# Altium PCB MiniRobot.PcbDoc
Units mm, origin at the board's own origin, x right, y up, seen from the top; angles counter-clockwise.
Board outline 90 x 85 mm, 2 copper layers (Top Layer, Bottom Layer); 52 components, 46 nets, 193 pads, 24 vias.
Unrouted connection lines stored in the file: 31.
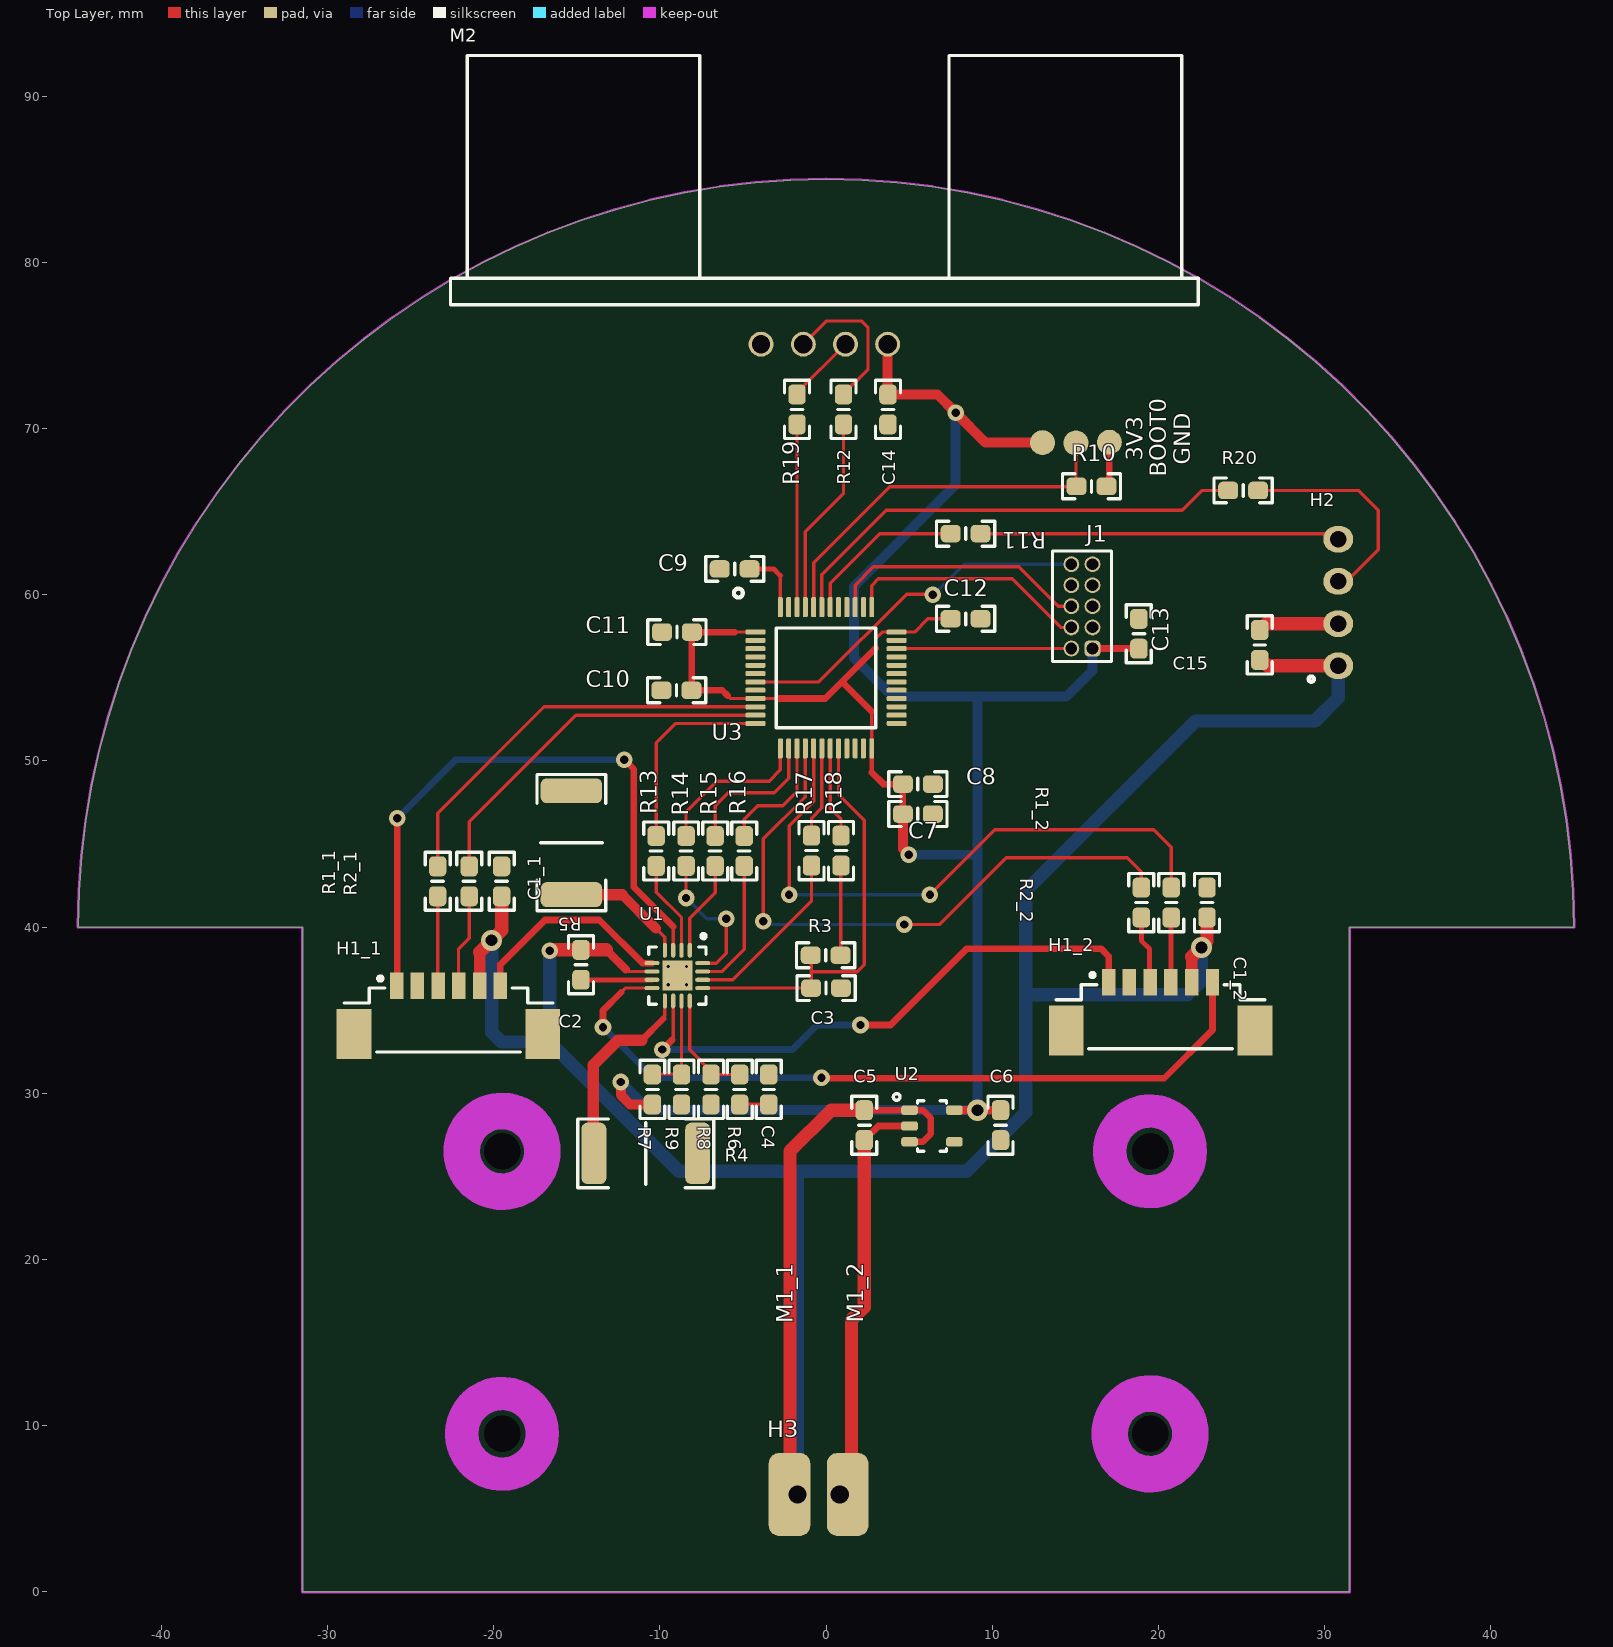
[diagram p0: Top Layer view]
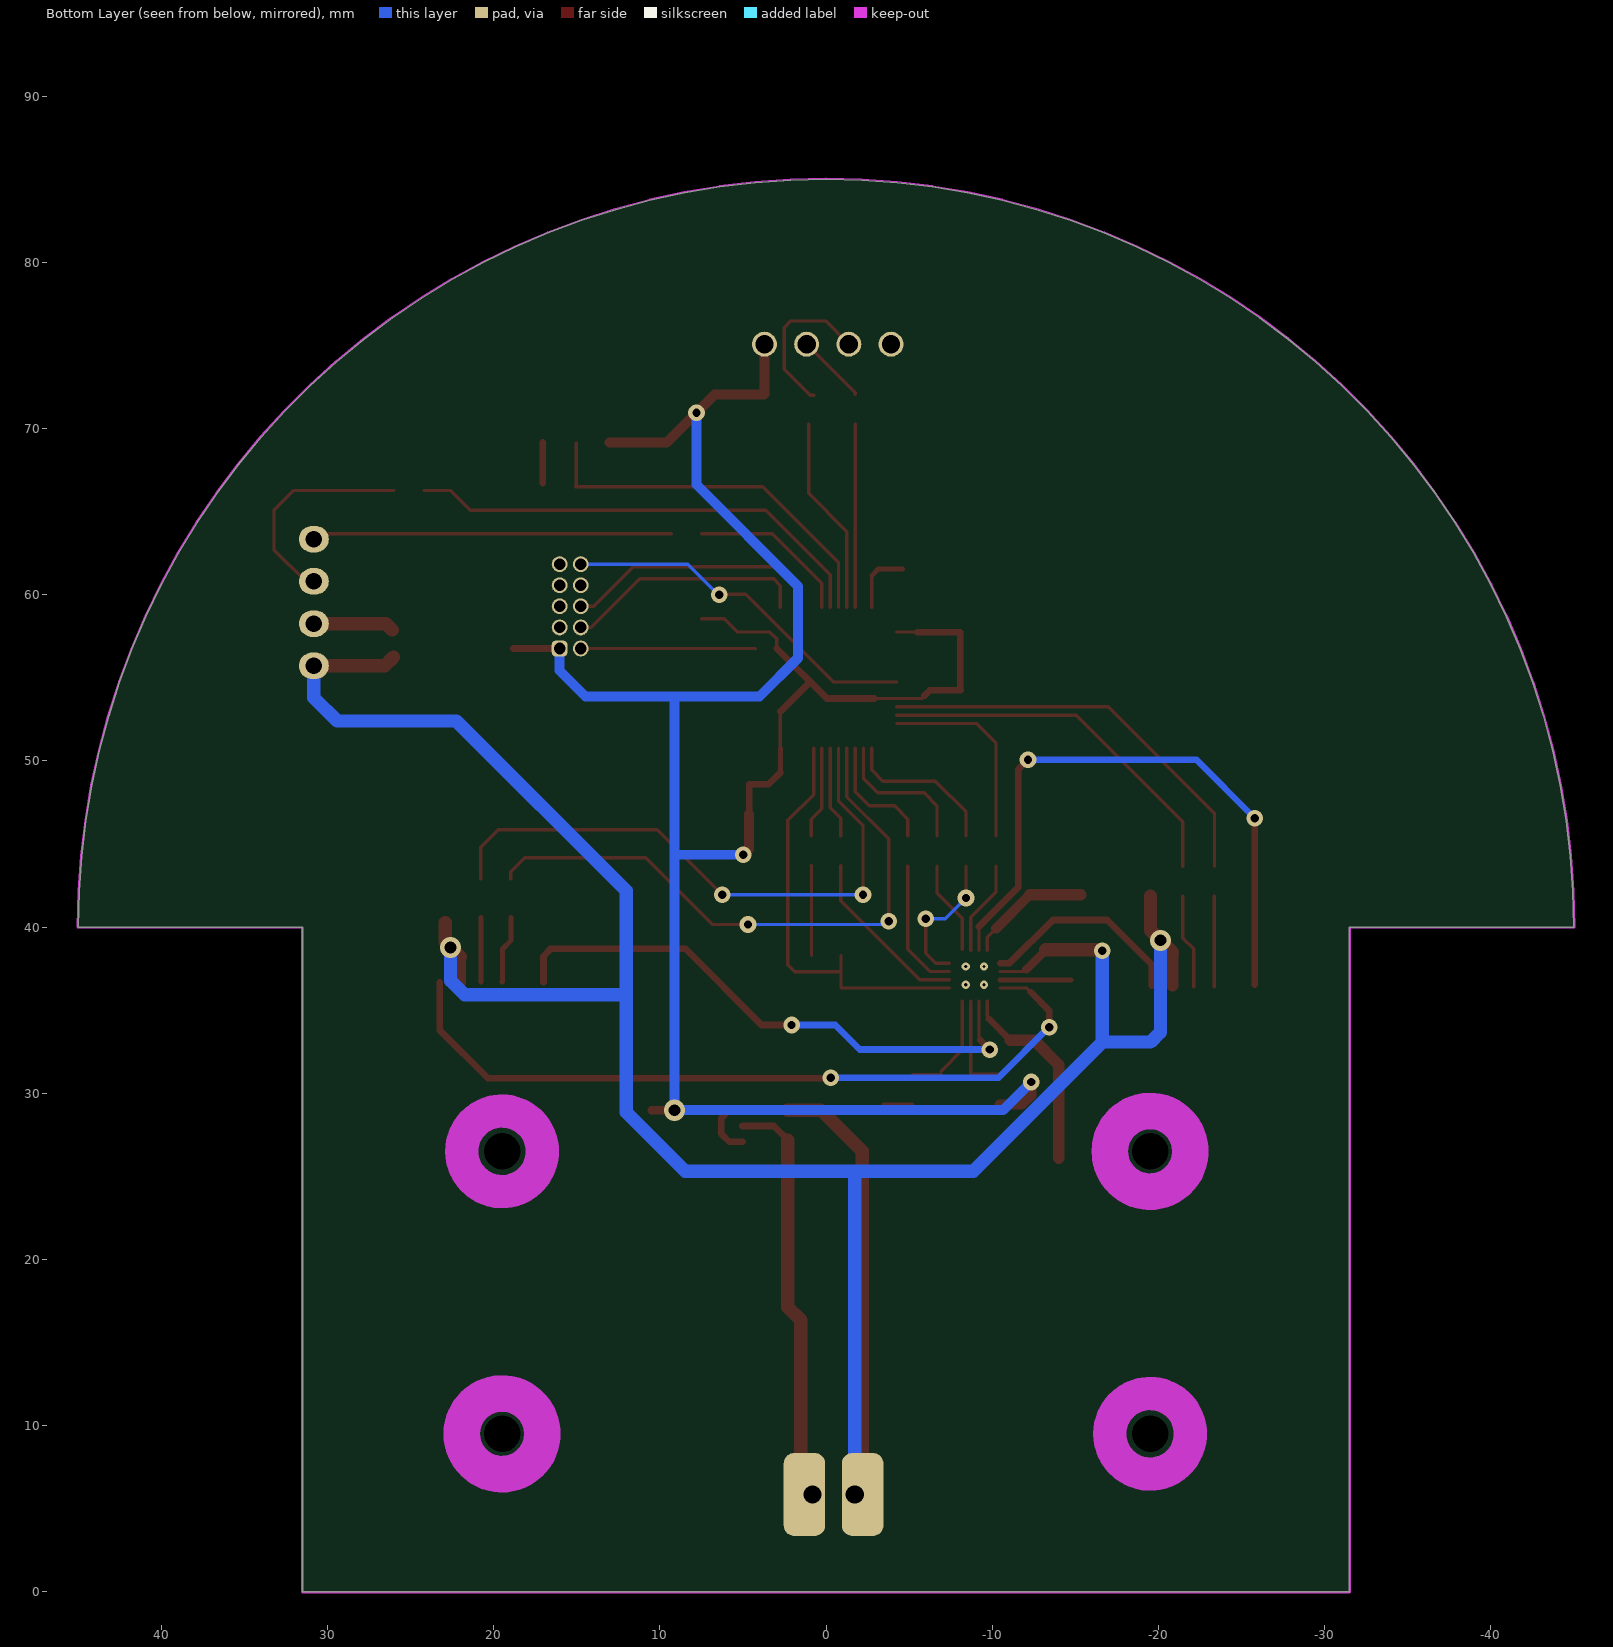
[diagram p1: Bottom Layer view, seen from below]

## Layer stack, top to bottom
Top Solder: solder mask 0.0102, Solder Resist, Dk 3.5
Top Layer: signal copper 0.0356
Dielectric 1: dielectric 0.32, FR-4, Dk 4.8
Bottom Layer: signal copper 0.0356
Bottom Solder: solder mask 0.0102, Solder Resist, Dk 3.5

## Board outline
45,40 44.949,42.141 44.796,44.278 44.542,46.404 44.187,48.516 43.732,50.609 43.177,52.678 42.525,54.718 41.777,56.725 40.933,58.694 39.998,60.62 38.971,62.5 37.856,64.329 36.656,66.103 35.372,67.817 34.009,69.469 32.568,71.054 31.054,72.568 29.469,74.009 27.817,75.372 26.103,76.656 24.329,77.856 22.5,78.971 20.62,79.998 18.694,80.933 16.725,81.777 14.718,82.525 12.678,83.177 10.609,83.732 8.516,84.187 6.404,84.542 4.278,84.796 2.141,84.949 0,85 -2.141,84.949 -4.278,84.796 -6.404,84.542 -8.516,84.187 -10.609,83.732 -12.678,83.177 -14.718,82.525 -16.725,81.777 -18.694,80.933 -20.62,79.998 -22.5,78.971 -24.329,77.856 -26.103,76.656 -27.817,75.372 -29.469,74.009 -31.054,72.568 -32.568,71.054 -34.009,69.469 -35.372,67.817 -36.656,66.103 -37.856,64.329 -38.971,62.5 -39.998,60.62 -40.933,58.694 -41.777,56.725 -42.525,54.718 -43.177,52.678 -43.732,50.609 -44.187,48.516 -44.542,46.404 -44.796,44.278 -44.949,42.141 -45,40 -31.5,40 -31.5,0 31.5,0 31.5,40

## Design rules (kind name [scope] priority, off if disabled: settings)
Clearance [All] p1 off: gap=0.25
ComponentClearance ComponentClearance_1 [All] p1 off: gap=0.001 collisioncheckmode=3 verticalgap=0.254 showdistances=FALSE
HoleSize [All] p1: absolutevalues=TRUE maxlimit=10 minlimit=0.19 maxpercent=80.000 minpercent=20.000
MinimumAnnularRing [All] p1: minimumring=0.076
MinimumSolderMaskSliver [All] p1: minsoldermaskwidth=0.154
PolygonConnect [All] p1: connectstyle=Relief reliefconductorwidth=0.254 reliefentries=4 polygonreliefangle="45 Angle" airgapwidth=0.254
RoutingVias [All] p1: holewidth=0.25 width=0.6 viastyle="Through Hole" minholewidth=0.2 minwidth=0.45 maxholewidth=1 maxwidth=2
SilkToSilkClearance [All] p1: silktosilkclearance=0.001
SilkToSolderMaskClearance [IsPad] p1: minsilkscreentomaskgap=0 clearancetoexposedcopper=TRUE
SolderMaskExpansion SolderMask_Via [IsVia] p1: expansion=-100
SolderMaskExpansion [All] p2: expansion=0.102
Width [All] p1: maxlimit=10 minlimit=0.075 preferedwidth=0.2 minimp=50.000000 maximp=50.000000 favimp=50.000000
24 further rules are at their usual default settings.

## Classes and differential pairs
component class U_MR_UartConnector: C15 H2 R20
component class U_MR_RangeSensor: C14 M2 R12
component class U_MR_Motor_Control: C2 C3 C4 R3 R4 R5 R6 R7 R8 R9 U1
channel class MR_Motor: LeftMotor RightMotor
component class U_MR_Power: C5 C6 H3 U2
component class RightMotor: C1_2 H1_2 M1_2 R1_2 R2_2
component class LeftMotor: C1_1 H1_1 M1_1 R1_1 R2_1
component class U_MR_Mcu: 3V3 BOOT0 C7 C8 C9 C10 C11 C12 C13 GND J1 R10 R11 R13 R14 R15 R16 R17 R18 R19 U3

## Components (designator, comment, footprint, x,y, rotation, side; value= is the part's Value field where it differs from the comment)
3V3 "TestPoint" ROUND_TEST_POINT 13.025,69.15 r180 top
BOOT0 "TestPoint" ROUND_TEST_POINT 15.037,69.125 r270 top
C1_1 "CerCap" 0603_CAP_LD -19.525,42.75 r270 top (schematic designator C1)
C1_2 "CerCap" 0603_CAP_LD 22.925,41.475 r270 top (schematic designator C1)
C2 "CerCap" 0603_CAP_LD -14.75,37.725 r90 top
C3 "CerCap" 0603_CAP_LD 0,36.325 r180 top
C4 "CerCap" 0603_CAP_LD -3.45,30.225 r270 top
C5 "CerCap" 0603_CAP_LD 2.3,28.075 r90 top
C6 "CerCap" 0603_CAP_LD 10.5,28.075 r90 top
C7 "CerCap" 0603_CAP_LD 5.525,46.8 r180 top
C8 "CerCap" 0603_CAP_LD 5.525,48.6 r180 top
C9 "CerCap" 0603_CAP_LD -5.5,61.55 r0 top
C10 "CerCap" 0603_CAP_LD -9,54.25 r0 top
C11 "CerCap" 0603_CAP_LD -8.975,57.75 r0 top
C12 "CerCap" 0603_CAP_LD 8.4,58.55 r180 top
C13 "CerCap" 0603_CAP_LD 18.825,57.65 r270 top
C14 "CerCap" 0603_CAP_LD 3.725,71.15 r90 top
C15 "CerCap" 0603_CAP_LD 26.1,56.975 r270 top
GND "TestPoint" ROUND_TEST_POINT 17.05,69.175 r90 top
H1_1 "Header" HEADER_1X6_PICOBLADE_653106124022 -22.725,34.4 r0 top (schematic designator H1)
H1_2 "Header" HEADER_1X6_PICOBLADE_653106124022 20.131,34.607 r0 top (schematic designator H1)
H2 "Header" "HE14 1x4 Straight" 30.825,59.53 r90 top
H3 "CustomBatteryConnector" CUSTOMBATTERYCONNECTOR -0.45,5.85 r0 top
J1 "Debug" 62201021121 15.4,59.3 r90 top
M1_1 "MotorGroup" MOTORGROUP -1,18 r0 top locked (schematic designator M1)
M1_2 "MotorGroup" MOTORGROUP 1,18 r180 top locked (schematic designator M1)
M2 "Ultrasonic Range Sensor" HC-SR04 -0.1,75.075 r0 top
R1_1 "Resistor" 0603_RES_LD -23.375,42.75 r270 top (schematic designator R1)
R1_2 "Resistor" 0603_RES_LD 18.975,41.475 r270 top (schematic designator R1)
R2_1 "Resistor" 0603_RES_LD -21.475,42.75 r270 top (schematic designator R2)
R2_2 "Resistor" 0603_RES_LD 20.775,41.475 r270 top (schematic designator R2)
R3 "Resistor" 0603_RES_LD -0.025,38.3 r0 top
R4 "Resistor" 2512_RES_LD -10.85,26.375 r180 top
R5 "Resistor" 2512_RES_LD -15.325,45.075 r270 top
R6 "Resistor" 0603_RES_LD -5.2,30.225 r90 top
R7 "Resistor" 0603_RES_LD -10.45,30.225 r270 top
R8 "Resistor" 0603_RES_LD -6.925,30.225 r90 top
R9 "Resistor" 0603_RES_LD -8.7,30.225 r90 top
R10 "Resistor" 0603_RES_LD 15.975,66.525 r180 top
R11 "Resistor" 0603_RES_LD 8.4,63.675 r180 top
R12 "Resistor" 0603_RES_LD 1.05,71.15 r90 top
R13 "Resistor" 0603_RES_LD -10.225,44.575 r90 top
R14 "Resistor" 0603_RES_LD -8.425,44.575 r90 top
R15 "Resistor" 0603_RES_LD -6.675,44.575 r90 top
R16 "Resistor" 0603_RES_LD -4.925,44.575 r90 top
R17 "Resistor" 0603_RES_LD -0.875,44.6 r90 top
R18 "Resistor" 0603_RES_LD 0.9,44.6 r90 top
R19 "Resistor" 0603_RES_LD -1.75,71.15 r270 top
R20 "Resistor" 0603_RES_LD 25.1,66.275 r0 top
U1 "Dual Brush Motor Driver" QFN-STSPIN240 -8.95,37.075 r270 top
U2 "Low noise, Low Iq LDO" LP5907 6.375,28.025 r0 top
U3 "Microcontroller" STM32_LQFP48 0,55 r0 top

## Footprints (in the part's own frame and the unit in brackets; to place one, negate y for a bottom-side part, rotate by r counter-clockwise, add the part's x,y. Pads: shape width x height; smd on the part's side, far side on the other; paste and mask are expansions set on the pad)
0603_CAP_LD [mm] "0603 Capacitor Low Density"
  rrect50% 1.2x1.05 smd: 1(-0.9,0) 2(0.9,0)
  silkscreen extent -1.75,-0.75 1.75,0.75
0603_RES_LD [mm] "0603 Resistor Low Density"
  rrect50% 1.2x1.05 smd: 1(-0.9,0) 2(0.9,0)
  silkscreen extent -1.75,-0.75 1.75,0.75
2512_RES_LD [mm] "2512 Low Density Resistor"
  rrect50% 1.5x3.7 smd: 1(-3.125,0) 2(3.125,0)
  silkscreen extent -4.1,-2.08 4.1,2.07
62201021121 [mm] "Pin Header, pitch 1.27 mm, THT, Vertical, dual row, 10p"
  rrect50% 0.95x0.95 hole 0.7: 1(-2.54,-0.635)
  round 0.95 hole 0.7: 2(-2.54,0.635) 3(-1.27,-0.635) 4(-1.27,0.635) 5(0,-0.635) 6(0,0.635) 7(1.27,-0.635) 8(1.27,0.635) 9(2.54,-0.635) 10(2.54,0.635)
  silkscreen extent -3.32,-1.78 3.33,1.78, body extent -3.17,-1.7 3.18,1.7, height 5.33
CUSTOMBATTERYCONNECTOR [mm] "CustomBatteryConnector"
  rrect50% 2.5x5 smd paste-100: +(-1.75,0) -(1.75,0)
  rrect50% 2.5x5 smd far side paste-100: +(-1.75,0) -(1.75,0)
  round 1.5 hole 1.1 unplated paste-100: +(-1.27,0) -(1.27,0)
HC-SR04 [mm] "HC-SR04"
  round 1.5 hole 1.1 unplated: 1(-3.81,0) 2(-1.27,0) 3(1.27,0) 4(3.81,0)
  silkscreen extent -22.5,2.37 22.5,17.38, body extent -22.72,-0.3 22.72,17.49, height 20
"HE14 1x4 Straight" [mm] "Connector HE14 Straight 1x4"
  oval 1.6x1.8 hole 1 mask+0.102: 1(-3.81,0) 2(-1.27,0) 3(1.27,0) 4(3.81,0)
  silkscreen extent -4.77,1.47 -4.45,1.78, body extent -5.08,-1.27 5.08,1.27, height 9.5
HEADER_1X6_PICOBLADE_653106124022 [mm] "1.25mm SMT Male Vertical Shrouded Header, 6p"
  rect 0.81x1.6 smd: 1(-3.125,2.07) 2(-1.875,2.07) 3(-0.625,2.07) 4(0.625,2.07) 5(1.875,2.07) 6(3.125,2.07)
  rect 2.1x3 smd: ""(-5.675,-0.83) ""(5.675,-0.83)
  silkscreen extent -6.27,-1.93 6.28,2.62
LP5907 [mm] "LP5907 SOT23"
  rrect50% 1x0.55 smd mask+0.102: 1(-1.35,0.95) 2(-1.35,0) 3(-1.35,-0.95) 4(1.35,-0.95) 5(1.35,0.95)
  silkscreen extent -2.33,-1.53 0.87,1.95
MOTORGROUP [mm]
  round 0 hole 2.2 unplated paste+0 mask+0: 21(-18.5,8.5) 22(-18.5,-8.5)
  Keep-Out Layer circle w2.2: c-18.5,8.5 r2.425
  Keep-Out Layer circle w2: c-18.5,-8.5 r2.425
QFN-STSPIN240 [mm] "QFN, 16-Leads, Body 3,00x3,00mm, Pitch 0,50mm, Thermal Pad 1,80x1,80mm, IPC Low Density"
  oval 0.9x0.25 smd: 1(-1.525,0.75) 2(-1.525,0.25) 3(-1.525,-0.25) 4(-1.525,-0.75) 9(1.525,-0.75) 10(1.525,-0.25) 11(1.525,0.25) 12(1.525,0.75)
  oval 0.25x0.9 smd: 5(-0.75,-1.525) 6(-0.25,-1.525) 7(0.25,-1.525) 8(0.75,-1.525) 13(0.75,1.525) 14(0.25,1.525) 15(-0.25,1.525) 16(-0.75,1.525)
  rect 1.8x1.8 smd: 17(0,0)
  silkscreen extent -2.5,-1.72 1.72,1.72
ROUND_TEST_POINT [mm] "Small round test point"
  round 1.5 smd paste-100: 1(0,0)
STM32_LQFP48 [mm]
  rrect50% 1.2x0.3 smd: 1(-4.25,2.75) 2(-4.25,2.25) 3(-4.25,1.75) 4(-4.25,1.25) 5(-4.25,0.75) 6(-4.25,0.25) 7(-4.25,-0.25) 8(-4.25,-0.75) 9(-4.25,-1.25) 10(-4.25,-1.75) 11(-4.25,-2.25) 12(-4.25,-2.75) 25(4.25,-2.75) 26(4.25,-2.25) 27(4.25,-1.75) 28(4.25,-1.25) 29(4.25,-0.75) 30(4.25,-0.25) 31(4.25,0.25) 32(4.25,0.75) 33(4.25,1.25) 34(4.25,1.75) 35(4.25,2.25) 36(4.25,2.75)
  rrect50% 0.3x1.2 smd: 13(-2.75,-4.25) 14(-2.25,-4.25) 15(-1.75,-4.25) 16(-1.25,-4.25) 17(-0.75,-4.25) 18(-0.25,-4.25) 19(0.25,-4.25) 20(0.75,-4.25) 21(1.25,-4.25) 22(1.75,-4.25) 23(2.25,-4.25) 24(2.75,-4.25) 37(2.75,4.25) 38(2.25,4.25) 39(1.75,4.25) 40(1.25,4.25) 41(0.75,4.25) 42(0.25,4.25) 43(-0.25,4.25) 44(-0.75,4.25) 45(-1.25,4.25) 46(-1.75,4.25) 47(-2.25,4.25) 48(-2.75,4.25)
  silkscreen extent -5.54,-3 3,5.37

## Part data
C1_1 C1_2 C2 C3 C4 C5 C6 C7 C8 C9 C10 C11 C12 C13 C14 C15: "Ceramic Capacitor"
H1_1 H1_2: library part Header_6x1, "Header 6x1 Pins"
H2: library part Header_4x1, "Header 4x1 PIns"
H3: library part BatteryConnector, "Custom Battery Connector"
J1: library part Cortex_10x2, "Cortex 10 pins Debug Connector"
M1_1 M1_2: library part Motor, "N20 Motor Group"
M2: library part HC-SR04
U1: library part STSPIN240, "ST Dual Motor Driver"
U2: library part LP5907, "LP5907 Low Noise Low Iq LDO"
U3: library part STM32F303CBT6, "STM32F303 Microcontroller"

## Via types
v1: diameter 1, hole 0.5, Top Layer to Bottom Layer, 17 vias
v2: diameter 0.5, hole 0.2, Top Layer to Bottom Layer, 4 vias
v3: diameter 1.27, hole 0.711, Top Layer to Bottom Layer, 3 vias

## Nets (pads, with @x,y where several pads share a name; then routed paths per layer and width w, separated by ;. In a path a pad name is that pad's centre, name@x,y a point inside that pad or via, vN(x,y) a via of type N, cw(c..) or ccw(c..) an arc to the next point about the centre after c; other vN are vias at no path point)
3V3: 3V3.1 C6.2 C7.2 C8.2 C9.2 C10.2 C11.2 C12.2 C13.2 C14.2 J1.1 M2.4 R7.2 U2.5 U3.1 U3.9 U3.24 U3.36 U3.48 | length 149.9
  Top Layer w0.2: -5.925,53.925 -5.75,53.75 U3.9 -2.9,53.75 ; -5.5,57.75 U3.1 ; U3.48 -2.75,61.15 ; U3.24 2.75,52.975 ; 2.975,56.775 2.975,57.35 3.375,57.75 U3.36 5.325,57.75 6.125,58.55 C12.2
  Top Layer w0.3: C9.2 -3.15,61.55 -2.75,61.15 ; 2.75,49.3 U3.24
  Top Layer w0.4: C10.2 -6.25,54.25 -5.925,53.925 ; C10.2@-8.075,54.275 C11.2 -5.5,57.75 ; -2.9,53.75 -0.05,53.75 2.975,56.775 ; 0.975,54.75 2.75,52.975 ; 2.75,49.3 3.45,48.6 C8.2 C7.2 ; J1.1 18.815,56.76 C13.2
  Top Layer w0.5: U2.5 v3(9.113,28.975) C6.2
  Top Layer w0.6: v1(-12.35,30.675) -12.35,29.875 -11.8,29.325 R7.2 ; C14.2@3.71,72.09 M2.4 ; C14.2 6.7,72.05 v1(7.8,70.95) 9.6,69.15 3V3.1 ; C7.2 4.625,44.7 v1(4.975,44.35)
  Bottom Layer w0.6: v1(-12.35,30.675) -10.65,28.975 v3(9.113,28.975) 9.113,44.35 ; v1(4.975,44.35) 9.113,44.35 ; v1(7.8,70.95) 7.8,66.625 1.675,60.5 1.675,56.2 4,53.875 14.475,53.875 16.035,55.435 J1.1 ; 9.113,53.875 9.113,44.35
BOOT0: BOOT0.1 R10.2 U3.44 | length 22.9
  Top Layer w0.2: U3.44 -0.75,61.925 3.825,66.5 R10.2@15.062,66.5 ; R10.2@15.037,66.563 BOOT0.1
GND: C1_1.1 C1_2.1 C2.1 C3.1 C4.1 C5.1 C6.1 C7.1 C8.1 C9.1 C10.1 C11.1 C12.1 C13.1 C14.1 C15.1 GND.1 H1_1.2 H1_2.2 H2.2 H3.- J1.3 J1.5 J1.9 M2.1 R4.1 R5.1 R8.1 R9.1 R10.1 U1.7 U2.2 U3.8 U3.23 U3.35 U3.47 | length 36.9
  Top Layer w0.2: H2.2@30.615,58.05 H2.2
  Top Layer w0.3: C2.1 U1.7
  Top Layer w0.4: C5.1 3.15,28.025 U2.2 ; R10.1@17.05,66.7 GND.1
  Top Layer w0.8: H3.-@0.82,5.85 1.525,6.555 1.525,16.35 2.3,17.125 C5.1 ; C15.1 26.485,58.26 H2.2
NetC3_2: C3.2 R3.1 U1.13 U3.20 | length 25.5
  Top Layer w0.2: U1.13 C3.2 -0.9,37.3 ; R3.1@-0.9,38.275 -0.9,37.3 ; U3.20 0.75,47.975 2.3,46.425 2.3,37.725 1.875,37.3 -0.9,37.3
NetC4_2: C4.2 R6.1 | length 1.8
  Top Layer w0.2: R6.1 C4.2
NetH1_1_1: H1_1.1 U1.3 | length 37.9
  Top Layer w0.2: H1_1.1 H1_1.1@-25.8,36.52 ; U1.3 -9.2,40.025
  Top Layer w0.4: H1_1.1@-25.8,36.52 v1(-25.8,46.55) ; v1(-12.15,50.075) -11.575,49.5 -11.575,42.4 -9.2,40.025
  Bottom Layer w0.4: v1(-25.8,46.55) -22.275,50.075 v1(-12.15,50.075)
NetH1_1_3: H1_1.3 R1_1.2 | length 5.5
  Top Layer w0.2: -23.375,41.106 -23.369,41.1 ; H1_1.3@-23.369,36.402 R1_1.2@-23.369,41.844
NetH1_1_4: H1_1.4 R2_1.2 | length 5.7
  Top Layer w0.2: H1_1.4@-22.119,36.402 -22.119,38.681 -21.475,39.325 R2_1.2
NetH1_1_6: H1_1.6 U1.5 | length 12.6
  Top Layer w0.4: H1_1.6 -19.6,37.75 -16.925,40.425 -13.65,40.425 -11.05,37.825 U1.5
NetH1_2_1: H1_2.1 U1.10 | length 34.3
  Top Layer w0.2: -9.275,33.2 -9.2,33.275 U1.10
  Top Layer w0.4: v1(-9.85,32.625) -9.275,33.2 ; v1(2.075,34.1) 3.875,34.1 8.475,38.7 16.55,38.7 17.006,38.244 H1_2.1
  Bottom Layer w0.4: v1(-9.85,32.625) -2.025,32.625 -0.55,34.1 v1(2.075,34.1)
NetH1_2_3: H1_2.3 R1_2.2 | length 4.1
  Top Layer w0.3: R1_2.2 18.975,39.175 19.475,38.675 19.475,36.709 H1_2.3
NetH1_2_4: H1_2.4 R2_2.2 | length 3.9
  Top Layer w0.3: H1_2.4 R2_2.2@20.756,40.575
NetH1_2_6: H1_2.6 U1.8 | length 46.5
  Top Layer w0.2: -12.325,36.075 -12.075,36.325 U1.8
  Top Layer w0.4: v1(-13.425,33.975) -13.425,34.975 -12.325,36.075 ; v1(-0.275,30.925) -0.25,30.9 20.35,30.9 23.256,33.806 H1_2.6
  Bottom Layer w0.4: v1(-13.425,33.975) -10.375,30.925 v1(-0.275,30.925)
NetH2_3: H2.3 R20.2 | length 13.3
  Top Layer w0.2: R20.2 32.025,66.275 33.225,65.075 33.225,62.7 31.325,60.8 H2.3
NetH2_4: H2.4 R11.1 | length 21.7
  Top Layer w0.2: R11.1 30.49,63.675 H2.4
NetM2_2: M2.2 R12.2 | length 9.6
  Top Layer w0.2: M2.2 0.03,76.475 2.125,76.475 2.525,76.075 2.525,73.575 0.95,72 R12.2@0.725,72
NetM2_3: M2.3 R19.1 | length 4.2
  Top Layer w0.2: R19.1 -1.75,72.155 M2.3
NetR1_1_1: R1_1.1 U3.10 | length 25
  Top Layer w0.2: R1_1.1 -23.375,46.85 -16.975,53.25 U3.10
NetR1_2_1: R1_2.1 U3.16 | length 36.4
  Top Layer w0.2: v1(-3.775,40.35) -3.775,45.3 -1.25,47.825 U3.16 ; v1(4.7,40.15) 6.825,40.15 10.85,44.175 18.125,44.175 18.975,43.325 R1_2.1@18.975,42.9
  Bottom Layer w0.2: v1@-3.575,40.15 v1(4.7,40.15)
NetR2_1_1: R2_1.1 U3.11 | length 22.6
  Top Layer w0.2: R2_1.1 -21.475,46.325 -15.05,52.75 U3.11
NetR2_2_1: R2_2.1 U3.17 | length 36.4
  Top Layer w0.2: v1(-2.225,41.95) -2.225,46.1 -0.75,47.575 U3.17 ; v1(6.25,41.95) 10.15,45.85 19.725,45.85 20.775,44.8 R2_2.1@20.775,42.9
  Bottom Layer w0.2: v1(-2.225,41.95) v1(6.25,41.95)
NetR3_2: R3.2 R18.1 | length 5.4
  Top Layer w0.2: R3.2 0.875,43.675 R18.1
NetR4_2: R4.2 U1.9 | length 12
  Top Layer w0.2: -9.8,34.55 -9.7,34.65 U1.9
  Top Layer w0.4: -11.1,33.175 -9.8,34.475
  Top Layer w0.7: R4.2@-14,26.1 -14,31.7 -12.525,33.175 -11.1,33.175
NetR5_2: R5.2 U1.4 | length 7.5
  Top Layer w0.2: -10.225,39.9 -9.7,39.375 U1.4
  Top Layer w0.6: -12.275,41.95 -10.225,39.9
  Top Layer w0.7: R5.2 -12.275,41.95
NetR6_2: R6.2 R8.2 U1.12 | length 6.5
  Top Layer w0.2: U1.12 -8.2,32.6 R8.2@-6.925,31.325 ; R8.2 R6.2
NetR7_1: R7.1 R9.2 U1.11 | length 6.1
  Top Layer w0.2: R7.1@-10.425,31.15 -8.7,31.15 U1.11
NetR11_2: R11.2 U3.42 | length 9.9
  Top Layer w0.2: U3.42 0.25,60.7 3.225,63.675 R11.2
NetR12_1: R12.1 U3.45 | length 12
  Top Layer w0.2: U3.45 -1.25,63.8 1.05,66.1 R12.1
NetR13_1: R13.1 U1.2 | length 5.7
  Top Layer w0.2: R13.1 -10.225,42.1 -8.7,40.575 U1.2
NetR13_2: R13.2 U3.12 | length 12.1
  Top Layer w0.2: R13.2 -10.225,51.075 -9.05,52.25 U3.12
NetR14_1: R14.1 U1.16 | length 8.6
  Top Layer w0.2: v1(-8.425,41.75) R14.1 ; U1.16 -6.6,37.825 -6,38.425 v1(-6,40.5)
  Bottom Layer w0.2: v1(-8.425,41.75) -7.175,40.5 v1(-6,40.5)
NetR14_2: R14.2 U3.13 | length 9.5
  Top Layer w0.2: R14.2 -8.425,46.925 -6.575,48.775 -3.425,48.775 -2.75,49.45 U3.13
NetR15_1: R15.1 U1.1 | length 5.7
  Top Layer w0.2: U1.1@-8.2,38.65 -8.2,40.525 -6.675,42.05 R15.1
NetR15_2: R15.2 U3.14 | length 8.7
  Top Layer w0.2: R15.2 -6.675,47.3 -5.9,48.075 -3.125,48.075 -2.25,48.95 U3.14
NetR16_1: R16.1 U1.15 | length 8.1
  Top Layer w0.2: U1.15 -6.25,37.325 -4.925,38.65 -4.925,38.875 R16.1
NetR16_2: R16.2 U3.15 | length 7.5
  Top Layer w0.2: R16.2 -4.925,46.5 -4.125,47.3 -2.6,47.3 -1.75,48.15 U3.15
NetR17_1: R17.1 U1.14 | length 10.6
  Top Layer w0.2: U1.14 -5.625,36.825 -0.875,41.575 R17.1
NetR17_2: R17.2 U3.18 | length 5.5
  Top Layer w0.2: R17.2 -0.875,46.55 -0.25,47.175 U3.18
NetR18_2: R18.2 U3.19 | length 5.5
  Top Layer w0.2: U3.19 0.25,47.125 0.9,46.475 R18.2
NetR19_2: R19.2 U3.46 | length 11
  Top Layer w0.2: U3.46 R19.2
NetR20_1: R20.1 U3.43 | length 28.5
  Top Layer w0.2: U3.43 -0.25,61.2 3.625,65.075 21.425,65.075 22.625,66.275 R20.1
nRST: J1.10 U3.7 | length 22
  Top Layer w0.2: U3.7 -0.43,54.75 4.845,60.025 6.275,60.025 v1@6.425,59.875
  Bottom Layer w0.2: v1@6.45,59.975 8.315,61.84 J1.10
  other v1: 6.425,60
SWCLK: J1.4 U3.37 | length 14.7
  Top Layer w0.2: U3.37 2.75,60.55 3.15,60.95 11.2,60.95 14.12,58.03 J1.4
SWDIO: J1.2 U3.34 | length 10.5
  Top Layer w0.2: U3.34 J1.2
SWO: J1.6 U3.39 | length 15.8
  Top Layer w0.2: U3.39 1.75,60.575 2.85,61.675 11.6,61.675 13.975,59.3 J1.6
VBATT: C1_1.2 C1_2.2 C2.2 C5.2 C15.2 H1_1.5 H1_2.5 H2.1 H3.+ U1.6 U2.1 U2.3 | length 173.9
  Top Layer w0.2: -12.05,37.45 -11.925,37.325 U1.6
  Top Layer w0.4: C5.2 U2.1 5.825,28.975 6.3,28.5 6.3,27.55 5.825,27.075 U2.3
  Top Layer w0.5: -13.225,38.625 -12.05,37.45
  Top Layer w0.7: H1_1.5 -20.85,38.475 ; H1_2.5 22.006,38.206
  Top Layer w0.8: -20.85,38.475 v3(-20.125,39.2) -19.525,39.8 C1_1.2 ; v1(-16.625,38.575) -16.575,38.625 C2.2 -13.225,38.625 ; H3.+@-1.72,5.85 -1.96,6.09 -2.175,6.305 -2.175,26.5 0.3,28.975 C5.2 ; 22.006,38.206 22.588,38.787 22.925,39.125 C1_2.2@22.925,40.25 ; C15.2@26.033,56.25 26.563,55.72 H2.1
  Bottom Layer w0.8: v3(-20.125,39.2) -20.125,33.675 -19.525,33.075 -16.625,33.075 ; v1(-16.625,38.575) -16.625,33.075 ; H3.+@-1.72,5.85 -1.72,25.3 ; 12.025,35.925 21.75,35.925 22.6,36.775 v3(22.6,38.775) ; H2.1 30.825,53.8 29.425,52.4 22.25,52.4 12.025,42.175 12.025,28.85 8.475,25.3 -8.85,25.3 -16.625,33.075
pads on no net: H1_1. H1_2. J1.7 J1.8 M1_1.21 M1_1.22 M1_2.21 M1_2.22 U1.17 U2.4 U3.2 U3.3 U3.4 U3.5 U3.6 U3.21 U3.22 U3.25 U3.26 U3.27 U3.28 U3.29 U3.30 U3.31 U3.32 U3.33 U3.38 U3.40 U3.41
copper on no net:
  other v2: -9.5,36.525 -8.4,36.525 -9.5,37.625 -8.4,37.625

## Keep-outs
Keep-Out Layer:
  lines w0.1: -37.899,64.355 -39.014,62.526 ; -27.847,75.412 -26.133,76.696 ; 44.999,42.141 ccw(c44.949,42.141) 44.999,42.142 ; -45.05,40.001 ccw(c-45,40) -45,39.95 ; -45.05,40.002 ccw(c-45,40) -45,39.95 ; -45.05,40.002 -44.999,42.142 ; -45.05,40.001 -45.05,40.002 ; -45,39.95 -31.55,39.95 -31.55,0 ; -44.999,42.142 cw(c-44.949,42.141) -44.999,42.145 ; -44.999,42.142 cw(c-44.949,42.141) -44.999,42.145 ; -44.999,42.142 -44.999,42.142 ; -44.999,42.145 -44.846,44.281 ; -44.846,44.281 cw(c-44.796,44.278) -44.846,44.283 ; -44.846,44.281 cw(c-44.796,44.278) -44.846,44.283 ; -44.846,44.283 -44.592,46.41 ; -44.592,46.41 cw(c-44.542,46.404) -44.591,46.413 ; -44.592,46.41 cw(c-44.542,46.404) -44.591,46.412 ; -44.591,46.413 -44.236,48.524 ; -44.591,46.412 -44.591,46.413 ; -44.236,48.525 cw(c-44.187,48.516) -44.236,48.527 ; -44.236,48.524 cw(c-44.187,48.516) -44.236,48.527 ; -44.236,48.524 -44.236,48.525 ; -44.236,48.527 ccw(c-44.187,48.516) -44.236,48.527 ; -44.236,48.527 -43.78,50.62 ; -44.236,48.527 -44.236,48.527 ; -44.236,48.527 -44.236,48.527 ; -43.78,50.62 cw(c-43.732,50.609) -43.78,50.622 ; -43.78,50.62 ccw(c-43.732,50.609) -43.78,50.62 ; -43.78,50.62 cw(c-43.732,50.609) -43.78,50.622 ; -43.78,50.62 -43.78,50.62 ; -43.78,50.62 -43.78,50.62 ; -43.78,50.622 ccw(c-43.732,50.609) -43.78,50.622 ; -43.78,50.622 -43.226,52.691 ; -43.78,50.622 -43.78,50.622 ; -43.78,50.622 -43.78,50.622 ; -43.226,52.691 cw(c-43.177,52.678) -43.225,52.693 ; -43.226,52.691 ccw(c-43.177,52.678) -43.226,52.691 ; -43.226,52.691 cw(c-43.177,52.678) -43.225,52.693 ; -43.226,52.691 -43.225,52.691 ; -43.226,52.691 -43.226,52.691 ; -43.225,52.693 -42.573,54.733 ; -42.573,54.733 cw(c-42.525,54.718) -42.572,54.735 ; -42.573,54.733 cw(c-42.525,54.718) -42.572,54.736 ; -42.572,54.736 ccw(c-42.525,54.718) -42.572,54.735 ; -42.572,54.736 -41.824,56.742 ; -42.572,54.736 -42.572,54.736 ; -42.572,54.735 -42.572,54.736 ; -41.823,56.742 cw(c-41.777,56.725) -41.823,56.744 ; -41.823,56.742 ccw(c-41.777,56.725) -41.823,56.742 ; -41.823,56.742 cw(c-41.777,56.725) -41.823,56.744 ; -41.823,56.742 -41.823,56.742 ; -41.824,56.742 -41.823,56.742 ; -41.823,56.744 -40.979,58.713 ; -40.979,58.713 cw(c-40.933,58.694) -40.979,58.715 ; -40.979,58.713 cw(c-40.933,58.694) -40.978,58.716 ; -40.979,58.715 cw(c-40.933,58.694) -40.978,58.716 ; -40.979,58.715 -40.978,58.716 ; -40.978,58.716 -40.043,60.642 ; -40.978,58.716 -40.978,58.716 ; -40.043,60.642 cw(c-39.998,60.62) -40.042,60.644 ; -40.043,60.642 cw(c-39.998,60.62) -40.043,60.642 ; -40.043,60.642 -40.043,60.642 ; -40.043,60.642 -40.043,60.642 ; -40.043,60.642 cw(c-39.998,60.62) -40.042,60.644 ; -40.041,60.644 -39.015,62.524 ; -39.015,62.524 cw(c-38.971,62.5) -39.014,62.526 ; -39.015,62.524 cw(c-38.971,62.5) -39.014,62.526 ; -37.848,64.396 ccw(c-37.806,64.367) -37.849,64.393 cw(c-37.806,64.367) -37.848,64.395 ; -37.848,64.396 -36.648,66.169 ; -37.848,64.395 -37.848,64.396 ; -36.647,66.169 cw(c-36.606,66.141) -36.646,66.171 ; -36.648,66.169 cw(c-36.606,66.141) -36.646,66.171 ; -36.648,66.169 -36.647,66.169 ; -36.646,66.171 -35.362,67.886 ; -35.362,67.886 cw(c-35.322,67.856) -35.361,67.887 ; -35.362,67.886 cw(c-35.322,67.856) -35.361,67.887 ; -35.361,67.887 -33.997,69.539 ; -33.997,69.539 cw(c-33.959,69.507) -33.996,69.541 ; -33.997,69.539 cw(c-33.959,69.507) -33.996,69.541 ; -33.996,69.541 cw(c-33.959,69.507) -33.996,69.541 ; -33.996,69.541 -33.996,69.541 ; -33.996,69.541 -33.996,69.541 ; -33.996,69.541 -32.555,71.125 ; -32.555,71.125 cw(c-32.518,71.092) -32.555,71.126 ; -32.555,71.125 -32.555,71.126 ; -32.555,71.126 cw(c-32.518,71.092) -32.553,71.127 ; -32.555,71.126 cw(c-32.518,71.092) -32.553,71.127 ; -32.555,71.126 -32.555,71.126 ; -32.553,71.127 -31.039,72.642 ; -31.55,0 ccw(c-31.5,0) -31.5,-0.05 ; -31.55,0 ccw(c-31.5,0) -31.5,-0.05 ; -31.5,-0.05 31.5,-0.05 ; -31.039,72.642 cw(c-31.004,72.606) -31.037,72.643 ; -31.039,72.642 cw(c-31.004,72.606) -31.037,72.643 ; -31.037,72.643 cw(c-31.004,72.606) -31.037,72.644 ; -31.037,72.643 -31.037,72.644 ; -31.037,72.643 -31.037,72.643 ; -31.037,72.644 -29.453,74.084 ; -29.453,74.084 cw(c-29.419,74.047) -29.452,74.084 ; -29.453,74.084 -29.452,74.084 ; -29.452,74.084 cw(c-29.419,74.047) -29.451,74.086 ; -29.452,74.084 cw(c-29.419,74.047) -29.451,74.086 ; -29.452,74.084 -29.452,74.084 ; -29.451,74.086 -27.799,75.449 ; -27.799,75.449 cw(c-27.767,75.411) -27.797,75.451 ccw(c-27.767,75.411) -27.799,75.449 ; -26.133,76.696 cw(c-26.103,76.656) -26.13,76.698 ; -26.133,76.696 cw(c-26.103,76.656) -26.131,76.697 -26.13,76.698 ; -26.13,76.698 -24.357,77.898 ; -24.357,77.898 cw(c-24.329,77.856) -24.355,77.899 ; -24.357,77.898 cw(c-24.329,77.856) -24.355,77.899 ; -24.357,77.898 -24.357,77.898 ; -24.355,77.899 -22.526,79.014 ; -22.526,79.014 cw(c-22.5,78.971) -22.524,79.015 ; -22.526,79.014 cw(c-22.5,78.971) -22.524,79.015 ; -22.524,79.015 -20.644,80.042 ; -20.644,80.041 cw(c-20.62,79.998) -20.642,80.042 ; -20.644,80.041 cw(c-20.62,79.998) -20.642,80.043 ; -20.642,80.042 cw(c-20.62,79.998) -20.642,80.043 ; -20.642,80.043 -20.642,80.043 ; -20.642,80.042 -20.642,80.043 ; -20.642,80.043 -18.716,80.978 ; -18.716,80.978 cw(c-18.694,80.933) -18.713,80.979 ; -18.715,80.979 ccw(c-18.694,80.933) -18.716,80.978 ; -18.715,80.979 cw(c-18.694,80.933) -18.713,80.979 ; -18.716,80.978 -18.715,80.979 ; -18.716,80.978 -18.716,80.978 ; -18.713,80.979 -16.745,81.823 ; -16.745,81.823 cw(c-16.725,81.777) -16.742,81.823 ; -16.745,81.823 cw(c-16.725,81.777) -16.742,81.823 ; -16.742,81.823 cw(c-16.725,81.777) -16.742,81.823 ; -16.742,81.823 -16.742,81.823 ; -16.742,81.823 -16.742,81.823 ; -16.742,81.823 -14.736,82.572 ; -14.736,82.572 cw(c-14.718,82.525) -14.735,82.572 ; -14.736,82.572 -14.736,82.572 ; -14.736,82.572 cw(c-14.718,82.525) -14.733,82.573 ; -14.735,82.572 cw(c-14.718,82.525) -14.733,82.573 ; -14.736,82.572 -14.735,82.572 ; -14.733,82.573 -12.693,83.225 ; -12.693,83.225 cw(c-12.678,83.177) -12.691,83.225 ; -12.693,83.225 cw(c-12.678,83.177) -12.691,83.226 ; -12.691,83.225 cw(c-12.678,83.177) -12.691,83.226 ; -12.691,83.225 -12.691,83.225 ; -12.691,83.226 -10.622,83.78 ; -12.691,83.225 -12.691,83.226 ; -10.622,83.78 cw(c-10.609,83.732) -10.622,83.78 ; -10.622,83.78 -10.622,83.78 ; -10.622,83.78 cw(c-10.609,83.732) -10.62,83.78 ; -10.622,83.78 cw(c-10.609,83.732) -10.62,83.78 ; -10.622,83.78 -10.622,83.78 ; -10.62,83.78 -8.527,84.236 ; -8.527,84.236 cw(c-8.516,84.187) -8.524,84.236 ; -8.527,84.236 cw(c-8.516,84.187) -8.525,84.236 -8.524,84.236 ; -8.524,84.236 -6.413,84.591 ; -6.412,84.591 cw(c-6.404,84.542) -6.41,84.592 ; -6.413,84.591 cw(c-6.404,84.542) -6.41,84.592 ; -6.413,84.591 -6.412,84.591 ; -6.41,84.592 -4.283,84.846 ; -4.283,84.846 cw(c-4.278,84.796) -4.281,84.846 ; -4.283,84.846 cw(c-4.278,84.796) -4.281,84.846 ; -4.281,84.846 -2.145,84.999 ; -2.145,84.999 cw(c-2.141,84.949) -2.142,84.999 ; -2.145,84.999 cw(c-2.141,84.949) -2.142,84.999 -2.142,84.999 ; -2.142,84.999 -0.002,85.05 ; -0.001,85.05 cw(c0,85) 0.002,85.05 ; -0.002,85.05 cw(c0,85) 0.001,85.05 0.002,85.05 ; -0.002,85.05 -0.001,85.05 ; 0.002,85.05 2.142,84.999 ; 2.142,84.999 cw(c2.141,84.949) 2.145,84.999 ; 2.142,84.999 cw(c2.141,84.949) 2.145,84.999 ; 2.142,84.999 2.142,84.999 ; 2.145,84.999 4.281,84.846 ; 4.281,84.846 cw(c4.278,84.796) 4.283,84.846 ; 4.281,84.846 cw(c4.278,84.796) 4.283,84.846 ; 4.283,84.846 6.41,84.592 ; 6.41,84.592 cw(c6.404,84.542) 6.413,84.591 ; 6.41,84.592 cw(c6.404,84.542) 6.412,84.591 ; 6.413,84.591 8.524,84.236 ; 6.412,84.591 6.413,84.591 ; 8.524,84.236 cw(c8.516,84.187) 8.527,84.236 ; 8.524,84.236 8.525,84.236 cw(c8.516,84.187) 8.527,84.236 ; 8.527,84.236 cw(c8.516,84.187) 8.527,84.236 ; 8.527,84.236 8.527,84.236 ; 8.527,84.236 10.62,83.78 ; 8.527,84.236 8.527,84.236 ; 10.62,83.78 cw(c10.609,83.732) 10.622,83.78 ; 10.62,83.78 ccw(c10.609,83.732) 10.62,83.78 ; 10.62,83.78 cw(c10.609,83.732) 10.622,83.78 ; 10.62,83.78 10.62,83.78 ; 10.62,83.78 10.62,83.78 ; 10.622,83.78 ccw(c10.609,83.732) 10.622,83.78 ; 10.622,83.78 12.691,83.226 ; 10.622,83.78 10.622,83.78 ; 10.622,83.78 10.622,83.78 ; 12.691,83.226 cw(c12.678,83.177) 12.693,83.225 ; 12.691,83.225 ccw(c12.678,83.177) 12.691,83.226 ; 12.691,83.225 cw(c12.678,83.177) 12.693,83.225 ; 12.691,83.225 12.691,83.225 ; 12.691,83.226 12.691,83.225 ; 12.693,83.225 14.733,82.573 ; 14.733,82.573 cw(c14.718,82.525) 14.735,82.572 ; 14.733,82.573 cw(c14.718,82.525) 14.736,82.572 ; 14.736,82.572 ccw(c14.718,82.525) 14.735,82.572 ; 14.736,82.572 16.742,81.823 ; 14.736,82.572 14.736,82.572 ; 14.735,82.572 14.736,82.572 ; 16.742,81.823 cw(c16.725,81.777) 16.744,81.823 ; 16.742,81.823 ccw(c16.725,81.777) 16.742,81.823 ; 16.742,81.823 cw(c16.725,81.777) 16.744,81.823 ; 16.742,81.823 16.742,81.823 ; 16.742,81.823 16.742,81.823 ; 16.744,81.823 18.713,80.979 ; 18.713,80.979 cw(c18.694,80.933) 18.715,80.979 ; 18.713,80.979 cw(c18.694,80.933) 18.716,80.978 ; 18.716,80.978 ccw(c18.694,80.933) 18.715,80.979 ; 18.716,80.978 20.642,80.043 ; 18.716,80.978 18.716,80.978 ; 18.715,80.979 18.716,80.978 ; 20.642,80.042 ccw(c20.62,79.998) 20.642,80.043 ; 20.642,80.042 cw(c20.62,79.998) 20.644,80.042 ; 20.642,80.043 20.642,80.043 ; 20.642,80.043 cw(c20.62,79.998) 20.644,80.042 ; 20.642,80.043 20.642,80.043 ; 20.644,80.042 22.524,79.015 ; 22.524,79.015 cw(c22.5,78.971) 22.526,79.014 ; 22.524,79.015 cw(c22.5,78.971) 22.526,79.014 ; 22.526,79.014 24.355,77.899 ; 24.355,77.899 cw(c24.329,77.856) 24.357,77.898 ; 24.355,77.899 cw(c24.329,77.856) 24.357,77.898 ; 24.357,77.898 26.13,76.698 ; 24.357,77.898 24.357,77.898 ; 26.13,76.698 cw(c26.103,76.656) 26.133,76.696 ; 26.13,76.698 26.131,76.697 cw(c26.103,76.656) 26.133,76.696 ; 26.133,76.696 27.847,75.412 ; 27.847,75.412 cw(c27.817,75.372) 27.849,75.411 ; 27.847,75.412 cw(c27.817,75.372) 27.849,75.411 ; 27.849,75.411 29.501,74.047 ; 29.501,74.047 cw(c29.469,74.009) 29.502,74.046 ; 29.501,74.047 cw(c29.469,74.009) 29.502,74.046 ; 29.502,74.046 cw(c29.469,74.009) 29.503,74.046 ; 29.502,74.046 29.502,74.046 ; 29.503,74.046 31.087,72.605 ; 29.503,74.046 29.502,74.046 ; 31.087,72.605 cw(c31.054,72.568) 31.087,72.605 ; 31.087,72.605 31.087,72.605 ; 31.087,72.605 cw(c31.054,72.568) 31.089,72.603 ; 31.087,72.605 cw(c31.054,72.568) 31.089,72.603 ; 31.087,72.605 31.087,72.605 ; 31.089,72.603 32.603,71.089 ; 31.5,-0.05 ccw(c31.5,0) 31.55,0 ; 31.5,-0.05 ccw(c31.5,0) 31.55,0 ; 31.55,0 31.55,39.95 45,39.95 ; 32.603,71.089 cw(c32.568,71.054) 32.605,71.087 ; 32.603,71.089 cw(c32.568,71.054) 32.605,71.087 ; 32.605,71.087 ccw(c32.568,71.054) 32.605,71.087 ; 32.605,71.087 32.605,71.087 ; 32.605,71.087 32.605,71.087 ; 32.605,71.087 34.046,69.503 ; 34.046,69.502 cw(c34.009,69.469) 34.047,69.501 ; 34.046,69.502 ccw(c34.009,69.469) 34.046,69.503 ; 34.046,69.502 cw(c34.009,69.469) 34.047,69.501 ; 34.046,69.503 34.046,69.502 ; 34.046,69.502 34.046,69.502 ; 34.047,69.501 35.411,67.849 ; 35.411,67.849 cw(c35.372,67.817) 35.412,67.847 ; 35.411,67.849 cw(c35.372,67.817) 35.412,67.847 ; 35.412,67.847 36.696,66.133 ; 36.696,66.133 cw(c36.656,66.103) 36.698,66.13 ; 36.696,66.133 cw(c36.656,66.103) 36.697,66.131 ; 36.697,66.131 36.698,66.13 ; 36.698,66.13 37.898,64.357 ; 37.898,64.357 cw(c37.856,64.329) 37.899,64.355 ; 37.898,64.357 cw(c37.856,64.329) 37.899,64.355 ; 37.898,64.357 37.898,64.357 ; 37.899,64.355 39.014,62.526 ; 39.014,62.526 cw(c38.971,62.5) 39.015,62.524 ; 39.014,62.526 cw(c38.971,62.5) 39.015,62.524 ; 39.015,62.524 40.042,60.644 ; 40.041,60.644 cw(c39.998,60.62) 40.042,60.642 ; 40.041,60.644 cw(c39.998,60.62) 40.043,60.642 ; 40.043,60.642 ccw(c39.998,60.62) 40.042,60.642 ; 40.043,60.642 40.042,60.642 ; 40.043,60.642 40.043,60.642 ; 40.043,60.642 40.978,58.716 ; 40.979,58.715 ccw(c40.933,58.694) 40.978,58.716 ; 40.979,58.715 cw(c40.933,58.694) 40.979,58.713 ; 40.979,58.715 40.978,58.716 ; 40.978,58.716 cw(c40.933,58.694) 40.979,58.713 ; 40.978,58.716 40.978,58.716 ; 40.979,58.713 41.822,56.745 ; 41.823,56.742 ccw(c41.777,56.725) 41.823,56.745 ; 41.823,56.742 ccw(c41.777,56.725) 41.823,56.742 ; 41.823,56.742 ccw(c41.777,56.725) 41.823,56.745 ; 41.823,56.742 41.823,56.742 ; 41.823,56.742 41.823,56.742 ; 41.823,56.742 42.572,54.736 ; 42.573,54.733 ccw(c42.525,54.718) 42.572,54.736 ; 42.573,54.733 ccw(c42.525,54.718) 42.572,54.735 ; 42.573,54.733 43.225,52.693 ; 42.572,54.735 ccw(c42.525,54.718) 42.572,54.736 ; 42.572,54.736 42.572,54.736 ; 42.572,54.736 42.572,54.735 ; 43.225,52.691 ccw(c43.177,52.678) 43.225,52.693 ; 43.226,52.691 ccw(c43.177,52.678) 43.225,52.691 ; 43.226,52.691 ccw(c43.177,52.678) 43.225,52.693 ; 43.225,52.691 43.225,52.691 ; 43.225,52.691 43.226,52.691 ; 43.226,52.691 43.78,50.622 ; 43.78,50.62 ccw(c43.732,50.609) 43.78,50.622 ; 43.78,50.62 ccw(c43.732,50.609) 43.78,50.62 ; 43.78,50.62 ccw(c43.732,50.609) 43.78,50.622 ; 43.78,50.62 43.78,50.62 ; 43.78,50.62 43.78,50.62 ; 43.78,50.62 44.236,48.527 ; 43.78,50.622 ccw(c43.732,50.609) 43.78,50.622 ; 43.78,50.622 43.78,50.622 ; 43.78,50.622 43.78,50.622 ; 44.236,48.524 ccw(c44.187,48.516) 44.236,48.527 ; 44.236,48.525 ccw(c44.187,48.516) 44.236,48.527 ; 44.236,48.525 44.236,48.524 ; 44.236,48.524 44.591,46.413 ; 44.236,48.527 ccw(c44.187,48.516) 44.236,48.527 ; 44.236,48.527 44.236,48.527 ; 44.236,48.527 44.236,48.527 ; 44.592,46.41 ccw(c44.542,46.404) 44.591,46.412 ; 44.592,46.41 ccw(c44.542,46.404) 44.591,46.413 ; 44.592,46.41 44.846,44.283 ; 44.591,46.413 44.591,46.412 ; 44.846,44.281 ccw(c44.796,44.278) 44.846,44.283 ; 44.846,44.281 ccw(c44.796,44.278) 44.846,44.283 ; 44.846,44.281 44.999,42.145 ; 45,39.95 ccw(c45,40) 45.05,40 ; 45,39.95 ccw(c45,40) 45.05,40 ; 44.999,42.142 ccw(c44.949,42.141) 44.999,42.145 ; 44.999,42.142 ccw(c44.949,42.141) 44.999,42.145 ; 44.999,42.142 44.999,42.142 ; 44.999,42.142 45.05,40.002 ; 45.05,40 ccw(c45,40) 45.05,40.001 ; 45.05,40 ccw(c45,40) 45.05,40.002 ; 45.05,40.001 45.05,40.002

## Silkscreen, mask and mechanical layers (free items; w line width, h text height)
Mechanical 1:
  drawing of 350 lines, arcs and shapes, not listed